# EAGLE board AS5600_Module_multi (EAGLE 9.4.2)
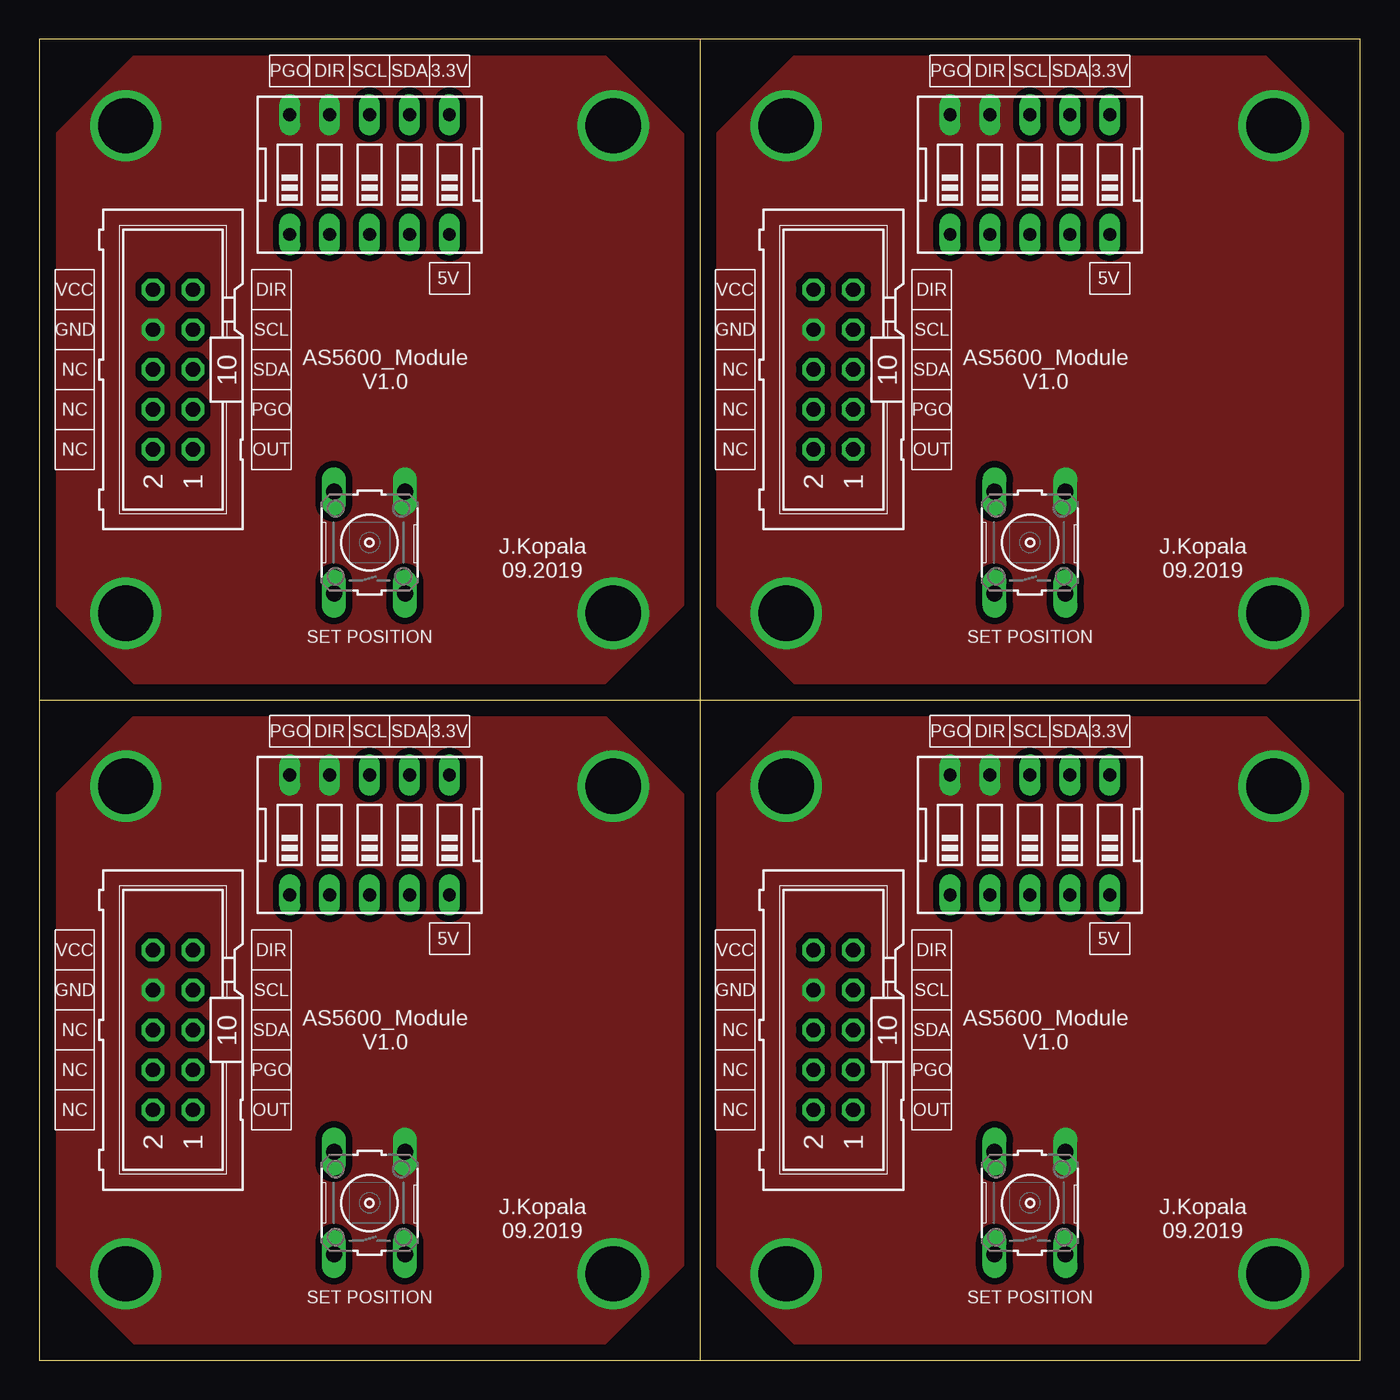
[diagram p0: board, top side]
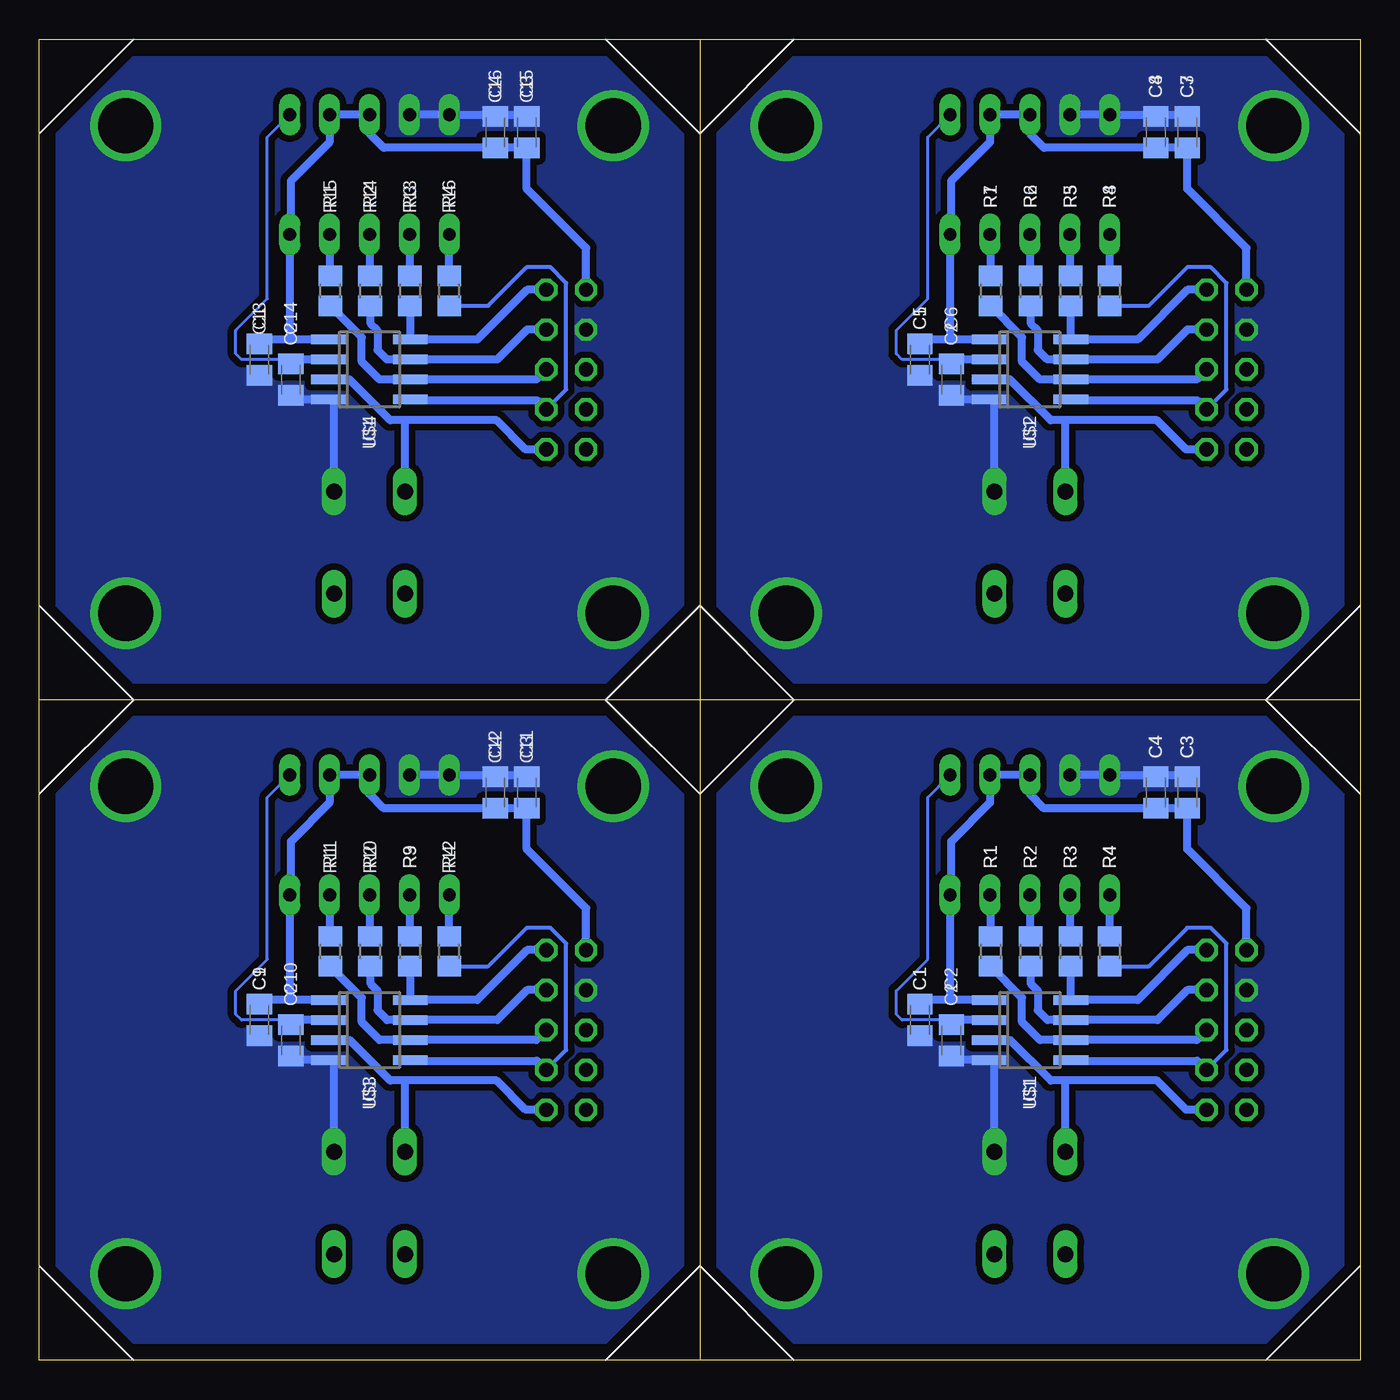
[diagram p1: board, bottom side, seen from below]

Size 84 x 84 mm. Coordinates in mm from the lower left corner, seen from the top.
Outline: 42,0 0,0 0,42
Outline: 0,42 42,42
Outline: 42,84 0,84 0,42
Outline: 42,0 84,0 84,42
Outline: 42,42 42,0
Outline: 42,42 84,42
Outline: 84,42 84,84 42,84
Outline: 42,84 42,42
Copper layers (1*16): Top 0.035mm / dielectric 1.5mm / Bottom 0.035mm
Design rules "default": minimum track width 6mil, minimum drill 0.35mm, track to track 6mil, track to pad 6mil, pad to pad 6mil, via to via 6mil, smd to smd 6mil, copper to edge 40mil, drill to drill 6mil, minimum pad ring 10mil, minimum via ring 8mil, stop-mask expansion 4mil, vias tented up to drill 0mil, thermal gap 10mil

## Footprints (pad centres in the part's own frame; a part is rotated, then mirrored left to right if it is on the bottom)
C0805K = smd 1.3 x 1.6: 1 -1,0; 2 1,0
ML10 = drill 0.914 octagon: 1 -5.08,-1.27; 2 -5.08,1.27; 3 -2.54,-1.27; 4 -2.54,1.27; 5 0,-1.27; 6 0,1.27; 7 2.54,-1.27; 8 2.54,1.27; 9 5.08,-1.27; 10 5.08,1.27
R0805 = smd 1.3 x 1.5: 1 -0.95,0; 2 0.95,0
B3F-10XX = drill 1.016 long: 1 -3.251,2.261; 2 3.251,2.261; 3 -3.251,-2.261; 4 3.251,-2.261
EDG-05 = drill 0.813 long: 1 -5.08,-3.81; 2 -2.54,-3.81; 3 0,-3.81; 4 2.54,-3.81; 5 5.08,-3.81; 6 5.08,3.81; 7 2.54,3.81; 8 0,3.81; 9 -2.54,3.81; 10 -5.08,3.81
SO8 = smd 0.6 x 2.2: 1 -1.905,-2.6; 2 -0.635,-2.6; 3 0.635,-2.6; 4 1.905,-2.6; 5 1.905,2.6; 6 0.635,2.6; 7 -0.635,2.6; 8 -1.905,2.6

## Placement (x,y rotation side)
C1  100nF  [C0805K]  28,21.64 270 bottom
C2  10uF  [C0805K]  26,20.35 270 bottom
C3  10uF  [C0805K]  11,36.1 90 bottom
C4  100nF  [C0805K]  13,36.1 90 bottom
C5  100nF  [C0805K]  28,63.64 270 bottom
C6  10uF  [C0805K]  26,62.35 270 bottom
C7  10uF  [C0805K]  11,78.1 90 bottom
C8  100nF  [C0805K]  13,78.1 90 bottom
C9  100nF  [C0805K]  70,21.64 270 bottom
C10  10uF  [C0805K]  68,20.35 270 bottom
C11  10uF  [C0805K]  53,36.1 90 bottom
C12  100nF  [C0805K]  55,36.1 90 bottom
C13  100nF  [C0805K]  70,63.64 270 bottom
C14  10uF  [C0805K]  68,62.35 270 bottom
C15  10uF  [C0805K]  53,78.1 90 bottom
C16  100nF  [C0805K]  55,78.1 90 bottom
CON1  [ML10]  8.5,21 90 top
CON2  [ML10]  8.5,63 90 top
CON3  [ML10]  50.5,21 90 top
CON4  [ML10]  50.5,63 90 top
R1  [R0805]  23.5,26 90 bottom
R2  [R0805]  20.96,26 90 bottom
R3  [R0805]  18.43,26 90 bottom
R4  [R0805]  15.93,26 90 bottom
R5  [R0805]  18.43,68 90 bottom
R6  [R0805]  20.96,68 90 bottom
R7  [R0805]  23.5,68 90 bottom
R8  [R0805]  15.93,68 90 bottom
R9  [R0805]  60.43,26 90 bottom
R10  [R0805]  62.96,26 90 bottom
R11  [R0805]  65.5,26 90 bottom
R12  [R0805]  57.93,26 90 bottom
R13  [R0805]  60.43,68 90 bottom
R14  [R0805]  62.96,68 90 bottom
R15  [R0805]  65.5,68 90 bottom
R16  [R0805]  57.93,68 90 bottom
S1  [B3F-10XX]  21,10 90 top
S2  [EDG-05]  21,33.4 0 top
S3  [EDG-05]  21,75.4 0 top
S4  [B3F-10XX]  21,52 90 top
S5  [EDG-05]  63,33.4 0 top
S6  [B3F-10XX]  63,10 90 top
S7  [EDG-05]  63,75.4 0 top
S8  [B3F-10XX]  63,52 90 top
U$1  AS5600  [SO8]  21,21 270 bottom
U$2  AS5600  [SO8]  21,63 270 bottom
U$3  AS5600  [SO8]  63,21 270 bottom
U$4  AS5600  [SO8]  63,63 270 bottom

## Library data of the parts
C1-C16 = rcl; SPICEPREFIX: C
CON1-CON4 = con-harting-ml; OC_FARNELL: unknown; OC_NEWARK: unknown
R1-R16 = rcl; SPICEPREFIX: R
S1 S4 S6 S8 = switch-omron; MPN: B3F-1000; OC_FARNELL: 176432; OC_NEWARK: 36M3542
S2 S3 S5 S7 = special
U$1-U$4 = ams_jatsekku

## Nets
+3V1: C6.1 S3.6 U$2.2
+3V2: C10.1 S5.6 U$3.2
+3V3: C2.1 S2.6 U$1.2
+3V4: C14.1 S7.6 U$4.2
+5V: C1.1 C3.1 C4.1 CON1.10 S2.5 S2.7 S2.8 U$1.1
+5V1: C5.1 C7.1 C8.1 CON2.10 S3.5 S3.7 S3.8 U$2.1
+5V2: C9.1 C11.1 C12.1 CON3.10 S5.5 S5.7 S5.8 U$3.1
+5V3: C13.1 C15.1 C16.1 CON4.10 S7.5 S7.7 S7.8 U$4.1
DIR: CON1.9 R3.1 U$1.8
DIR1: CON2.9 R5.1 U$2.8
DIR2: CON3.9 R9.1 U$3.8
DIR3: CON4.9 R13.1 U$4.8
GND: C1.2 C2.2 C3.2 C4.2 CON1.8 S1.4 S2.9 S2.10 U$1.4
GND1: C5.2 C6.2 C7.2 C8.2 CON2.8 S3.9 S3.10 S4.4 U$2.4
GND2: C9.2 C10.2 C11.2 C12.2 CON3.8 S5.9 S5.10 S6.4 U$3.4
GND3: C13.2 C14.2 C15.2 C16.2 CON4.8 S7.9 S7.10 S8.4 U$4.4
N$1: R5.2 S3.2
N$2: R6.2 S3.3
N$3: R3.2 S2.2
N$4: R2.2 S2.3
N$5: R1.2 S2.4
N$6: R4.2 S2.1
N$7: R7.2 S3.4
N$8: R8.2 S3.1
N$9: R9.2 S5.2
N$10: R10.2 S5.3
N$11: R11.2 S5.4
N$12: R12.2 S5.1
N$13: R13.2 S7.2
N$14: R14.2 S7.3
N$15: R15.2 S7.4
N$16: R16.2 S7.1
OUT: CON1.1 S1.2 U$1.3
OUT1: CON2.1 S4.2 U$2.3
OUT2: CON3.1 S6.2 U$3.3
OUT3: CON4.1 S8.2 U$4.3
PGO: CON1.3 R4.1 U$1.5
PGO1: CON2.3 R8.1 U$2.5
PGO2: CON3.3 R12.1 U$3.5
PGO3: CON4.3 R16.1 U$4.5
SCL: CON1.7 R2.1 U$1.7
SCL1: CON2.7 R6.1 U$2.7
SCL2: CON3.7 R10.1 U$3.7
SCL3: CON4.7 R14.1 U$4.7
SDA: CON1.5 R1.1 U$1.6
SDA1: CON2.5 R7.1 U$2.6
SDA2: CON3.5 R11.1 U$3.6
SDA3: CON4.5 R15.1 U$4.6

## Tracks (layer width: path | path; a pad name or v marks a point on that pad's centre or on a via)
+3V1
  Bottom 0.2: C6.1 26,63.64 29.14,63.64 29.5,64 29.5,65.5 27.5,67.5 27.5,77.79 S3.6
  Bottom 0.254: C6.1 26.22,63.57
  Bottom 0.508: C6.1 26,63.63 U$2.2
+3V2
  Bottom 0.2: C10.1 68,21.64 71.14,21.64 71.5,22 71.5,23.5 69.5,25.5 69.5,35.79 S5.6
  Bottom 0.254: C10.1 68.22,21.57
  Bottom 0.508: C10.1 68,21.64 U$3.2
+3V3
  Bottom 0.2: C2.1 26,21.64 29.14,21.64 29.5,22 29.5,23.5 27.5,25.5 27.5,35.79 S2.6
  Bottom 0.254: C2.1 26.22,21.57
  Bottom 0.508: C2.1 26,21.64 U$1.2
+3V4
  Bottom 0.2: C14.1 68,63.64 71.14,63.64 71.5,64 71.5,65.5 69.5,67.5 69.5,77.79 S7.6
  Bottom 0.254: C14.1 68.22,63.57
  Bottom 0.508: C14.1 68,63.63 U$4.2
+5V
  Bottom 0.508: 27.89,22.64 C1.1 27.73,22.91 26.07,22.91 | U$1.1 26.07,22.91 | 26.07,22.91 26.08,22.91 S2.5 26,29.67 26,33 23.54,35.46 S2.7 S2.8 21,36 20.1,35.1 C4.1 C3.1 11,32.5 7.23,28.73 CON1.10
+5V1
  Bottom 0.508: 27.89,64.64 C5.1 27.73,64.91 26.07,64.91 | U$2.1 26.07,64.91 | 26.07,64.91 26.08,64.92 S3.5 26,71.67 26,75 23.54,77.46 S3.7 S3.8 21,78 20.1,77.1 C8.1 C7.1 11,74.5 7.23,70.73 CON2.10
+5V2
  Bottom 0.508: 69.89,22.64 C9.1 69.73,22.91 68.07,22.91 | U$3.1 68.07,22.91 | 68.07,22.91 68.08,22.91 S5.5 68,29.67 68,33 65.54,35.46 S5.7 S5.8 63,36 62.1,35.1 C12.1 C11.1 53,32.5 49.23,28.73 CON3.10
+5V3
  Bottom 0.508: 69.89,64.64 C13.1 69.73,64.91 68.07,64.91 | U$4.1 68.07,64.91 | 68.07,64.91 68.08,64.92 S7.5 68,71.67 68,75 65.54,77.46 S7.7 S7.8 63,78 62.1,77.1 C16.1 C15.1 53,74.5 49.23,70.73 CON4.10
DIR
  Bottom 0.508: CON1.9 10.98,26.08 14.15,22.91 U$1.8 18.43,22.93 R3.1
DIR1
  Bottom 0.508: CON2.9 10.98,68.08 14.15,64.91 U$2.8 18.43,64.93 R5.1
DIR2
  Bottom 0.508: CON3.9 52.98,26.08 56.16,22.91 U$3.8 60.43,22.93 R9.1
DIR3
  Bottom 0.508: CON4.9 52.98,68.08 56.16,64.91 U$4.8 60.43,64.93 R13.1
GND  (via drill 3.5)
  Bottom 0.508: S1.4 23.26,19.04 23.32,19.09 U$1.4 25.75,19.09 C2.2 | S2.9 S2.10 11.11,37.21 C3.2
  other vias: 5.5,36.5 5.5,5.5 36.5,36.5 36.5,5.5
  pour Bottom (isolate 0.406, no thermals): 1,6 6,1 36,1 41,6 41,36 36,41 6,41 1,36
  pour Top (isolate 0.406, no thermals): 6,41 1,36 1,6 6,1 36,1 41,6 41,36 36,41
GND1  (via drill 3.5)
  Bottom 0.508: S4.4 23.26,61.04 23.32,61.09 U$2.4 25.75,61.09 C6.2 | S3.9 S3.10 11.11,79.21 C7.2
  other vias: 5.5,78.5 5.5,47.5 36.5,78.5 36.5,47.5
  pour Bottom (isolate 0.406, no thermals): 1,48 6,43 36,43 41,48 41,78 36,83 6,83 1,78
  pour Top (isolate 0.406, no thermals): 6,83 1,78 1,48 6,43 36,43 41,48 41,78 36,83
GND2  (via drill 3.5)
  Bottom 0.508: S6.4 65.26,19.04 65.32,19.09 U$3.4 67.75,19.09 C10.2 | S5.9 S5.10 53.11,37.21 C11.2
  other vias: 47.5,36.5 47.5,5.5 78.5,36.5 78.5,5.5
  pour Bottom (isolate 0.406, no thermals): 43,6 48,1 78,1 83,6 83,36 78,41 48,41 43,36
  pour Top (isolate 0.406, no thermals): 48,41 43,36 43,6 48,1 78,1 83,6 83,36 78,41
GND3  (via drill 3.5)
  Bottom 0.508: S8.4 65.26,61.04 65.32,61.09 U$4.4 67.75,61.09 C14.2 | S7.9 S7.10 53.11,79.21 C15.2
  other vias: 47.5,78.5 47.5,47.5 78.5,78.5 78.5,47.5
  pour Bottom (isolate 0.406, no thermals): 43,48 48,43 78,43 83,48 83,78 78,83 48,83 43,78
  pour Top (isolate 0.406, no thermals): 48,83 43,78 43,48 48,43 78,43 83,48 83,78 78,83
N$1
  Bottom 0.508: R5.2 18.43,71.56 S3.2
N$2
  Bottom 0.508: R6.2 20.96,71.55 S3.3
N$3
  Bottom 0.508: R3.2 18.43,29.56 S2.2
N$4
  Bottom 0.508: R2.2 20.96,29.55 S2.3
N$5
  Bottom 0.508: R1.2 23.5,29.55 S2.4
N$6
  Bottom 0.508: R4.2 S2.1
N$7
  Bottom 0.508: R7.2 23.5,71.55 S3.4
N$8
  Bottom 0.508: R8.2 S3.1
N$9
  Bottom 0.508: R9.2 60.43,29.56 S5.2
N$10
  Bottom 0.508: R10.2 62.96,29.55 S5.3
N$11
  Bottom 0.508: R11.2 65.5,29.55 S5.4
N$12
  Bottom 0.508: R12.2 S5.1
N$13
  Bottom 0.508: R13.2 60.43,71.56 S7.2
N$14
  Bottom 0.508: R14.2 62.96,71.55 S7.3
N$15
  Bottom 0.508: R15.2 65.5,71.55 S7.4
N$16
  Bottom 0.508: R16.2 S7.1
OUT
  Bottom 0.508: U$1.3 22.27,20.36 19.68,17.78 18.74,17.78 | CON1.1 11.07,15.92 12.93,17.78 18.74,17.78 | S1.2 18.74,17.78
OUT1
  Bottom 0.508: U$2.3 22.27,62.37 19.68,59.78 18.74,59.78 | CON2.1 11.07,57.92 12.93,59.78 18.74,59.78 | S4.2 18.74,59.78
OUT2
  Bottom 0.508: U$3.3 64.27,20.36 61.69,17.78 60.74,17.78 | CON3.1 53.07,15.92 54.93,17.78 60.74,17.78 | S6.2 60.74,17.78
OUT3
  Bottom 0.508: U$4.3 64.27,62.37 61.69,59.78 60.74,59.78 | CON4.1 53.07,57.92 54.93,59.78 60.74,59.78 | S8.2 60.74,59.78
PGO
  Bottom 0.254: CON1.3 8.5,19.73 8.5,26.5 9.5,27.5 11,27.5 13.45,25.05 R4.1
  Bottom 0.508: U$1.5 18.36,19.05 10.36,19.05 CON1.3
PGO1
  Bottom 0.254: CON2.3 8.5,61.73 8.5,68.5 9.5,69.5 11,69.5 13.45,67.05 R8.1
  Bottom 0.508: U$2.5 18.36,61.05 10.36,61.05 CON2.3
PGO2
  Bottom 0.254: CON3.3 50.5,19.73 50.5,26.5 51.5,27.5 53,27.5 55.45,25.05 R12.1
  Bottom 0.508: U$3.5 60.35,19.05 52.36,19.05 CON3.3
PGO3
  Bottom 0.254: CON4.3 50.5,61.73 50.5,68.5 51.5,69.5 53,69.5 55.45,67.05 R16.1
  Bottom 0.508: U$4.5 60.35,61.05 52.36,61.05 CON4.3
SCL
  Bottom 0.508: CON1.7 10.98,23.54 12.88,21.64 U$1.7 19.89,21.64 20.5,22.25 20.5,23.5 20.96,23.96 R2.1
SCL1
  Bottom 0.508: CON2.7 10.98,65.54 12.88,63.63 U$2.7 19.89,63.63 20.5,64.25 20.5,65.5 20.96,65.96 R6.1
SCL2
  Bottom 0.508: CON3.7 52.98,23.54 54.88,21.64 U$3.7 61.88,21.64 62.5,22.25 62.5,23.5 62.96,23.96 R10.1
SCL3
  Bottom 0.508: CON4.7 52.98,65.54 54.88,63.63 U$4.7 61.88,63.63 62.5,64.25 62.5,65.5 62.96,65.96 R14.1
SDA
  Bottom 0.508: CON1.5 10.4,20.36 U$1.6 20.36,20.36 21.5,21.5 21.5,23.05 R1.1
SDA1
  Bottom 0.508: CON2.5 10.4,62.37 U$2.6 20.36,62.37 21.5,63.5 21.5,65.05 R7.1
SDA2
  Bottom 0.508: CON3.5 52.41,20.36 U$3.6 62.37,20.36 63.5,21.5 63.5,23.05 R11.1
SDA3
  Bottom 0.508: CON4.5 52.41,62.37 U$4.6 62.37,62.37 63.5,63.5 63.5,65.05 R15.1

## Text on the board
tPlace: PGO | DIR | SCL | SDA | 3.3V | PGO | DIR | SCL | SDA | 3.3V | 5V | 5V | VCC | DIR | VCC | DIR | GND | SCL | GND | SCL | NC | SDA | AS5600_Module / V1.0 | NC | SDA | AS5600_Module / V1.0 | NC | PGO | NC | PGO | NC | OUT | NC | OUT | J.Kopala / 09.2019 | J.Kopala / 09.2019 | SET POSITION | SET POSITION | PGO | DIR | SCL | SDA | 3.3V | PGO | DIR | SCL | SDA | 3.3V | 5V | 5V | VCC | DIR | VCC | DIR | GND | SCL | GND | SCL | NC | SDA | AS5600_Module / V1.0 | NC | SDA | AS5600_Module / V1.0 | NC | PGO | NC | PGO | NC | OUT | NC | OUT | J.Kopala / 09.2019 | J.Kopala / 09.2019 | SET POSITION | SET POSITION
_bNames: C3 | C4 | C3 | C4 | R4 | R3 | R2 | R1 | R4 | R3 | R2 | R1 | C1 | C1 | C2 | C2 | IC1 | IC1 | C3 | C4 | C3 | C4 | R4 | R3 | R2 | R1 | R4 | R3 | R2 | R1 | C1 | C1 | C2 | C2 | IC1 | IC1